# EAGLE board SAMD21_Pro_RF-Panel (EAGLE 9.6.2), part 1 of 4
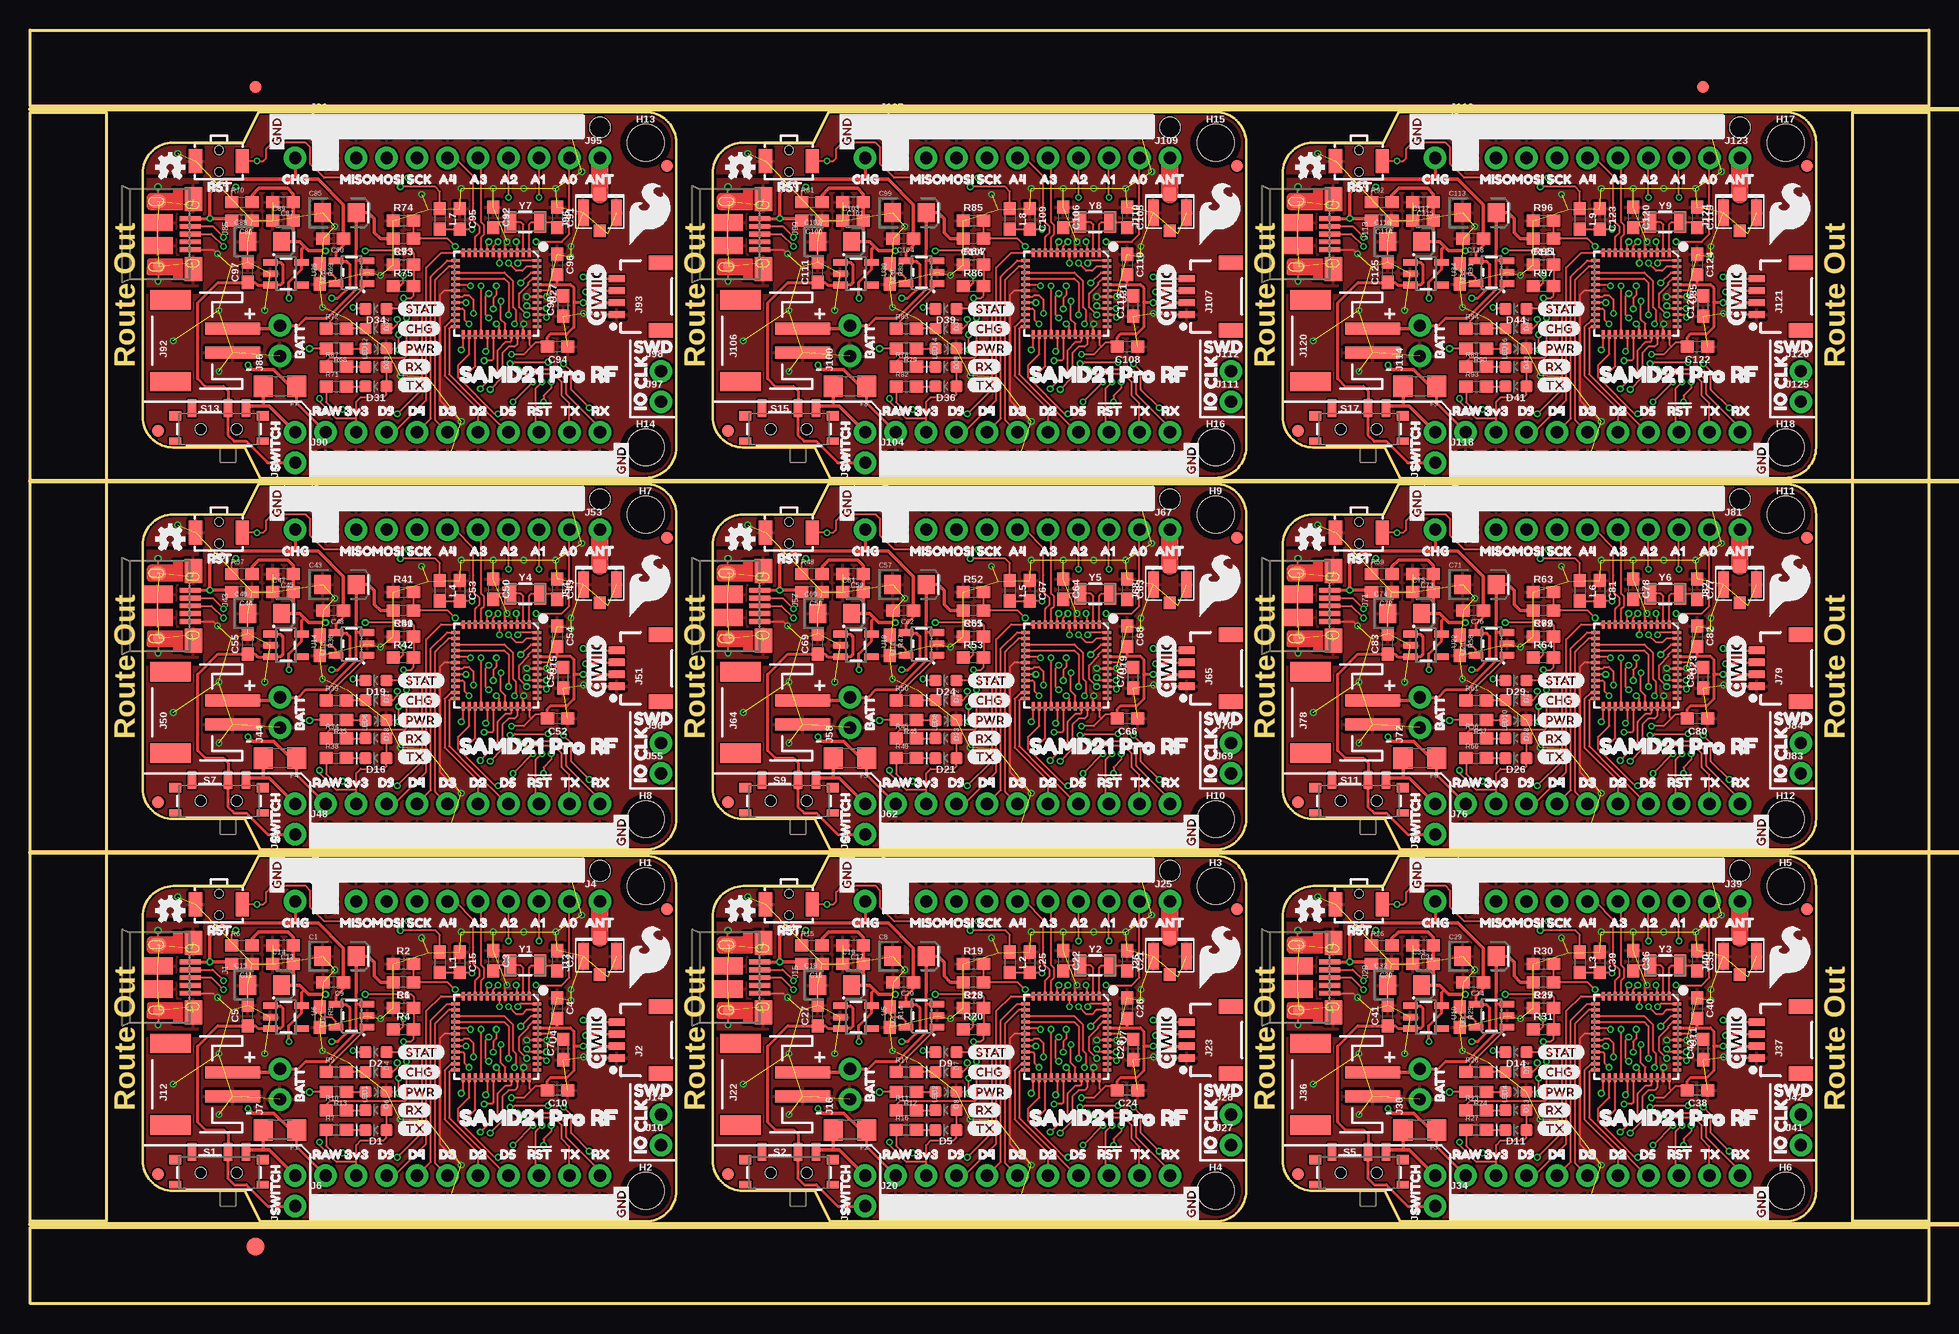
[diagram p0: board, top side]
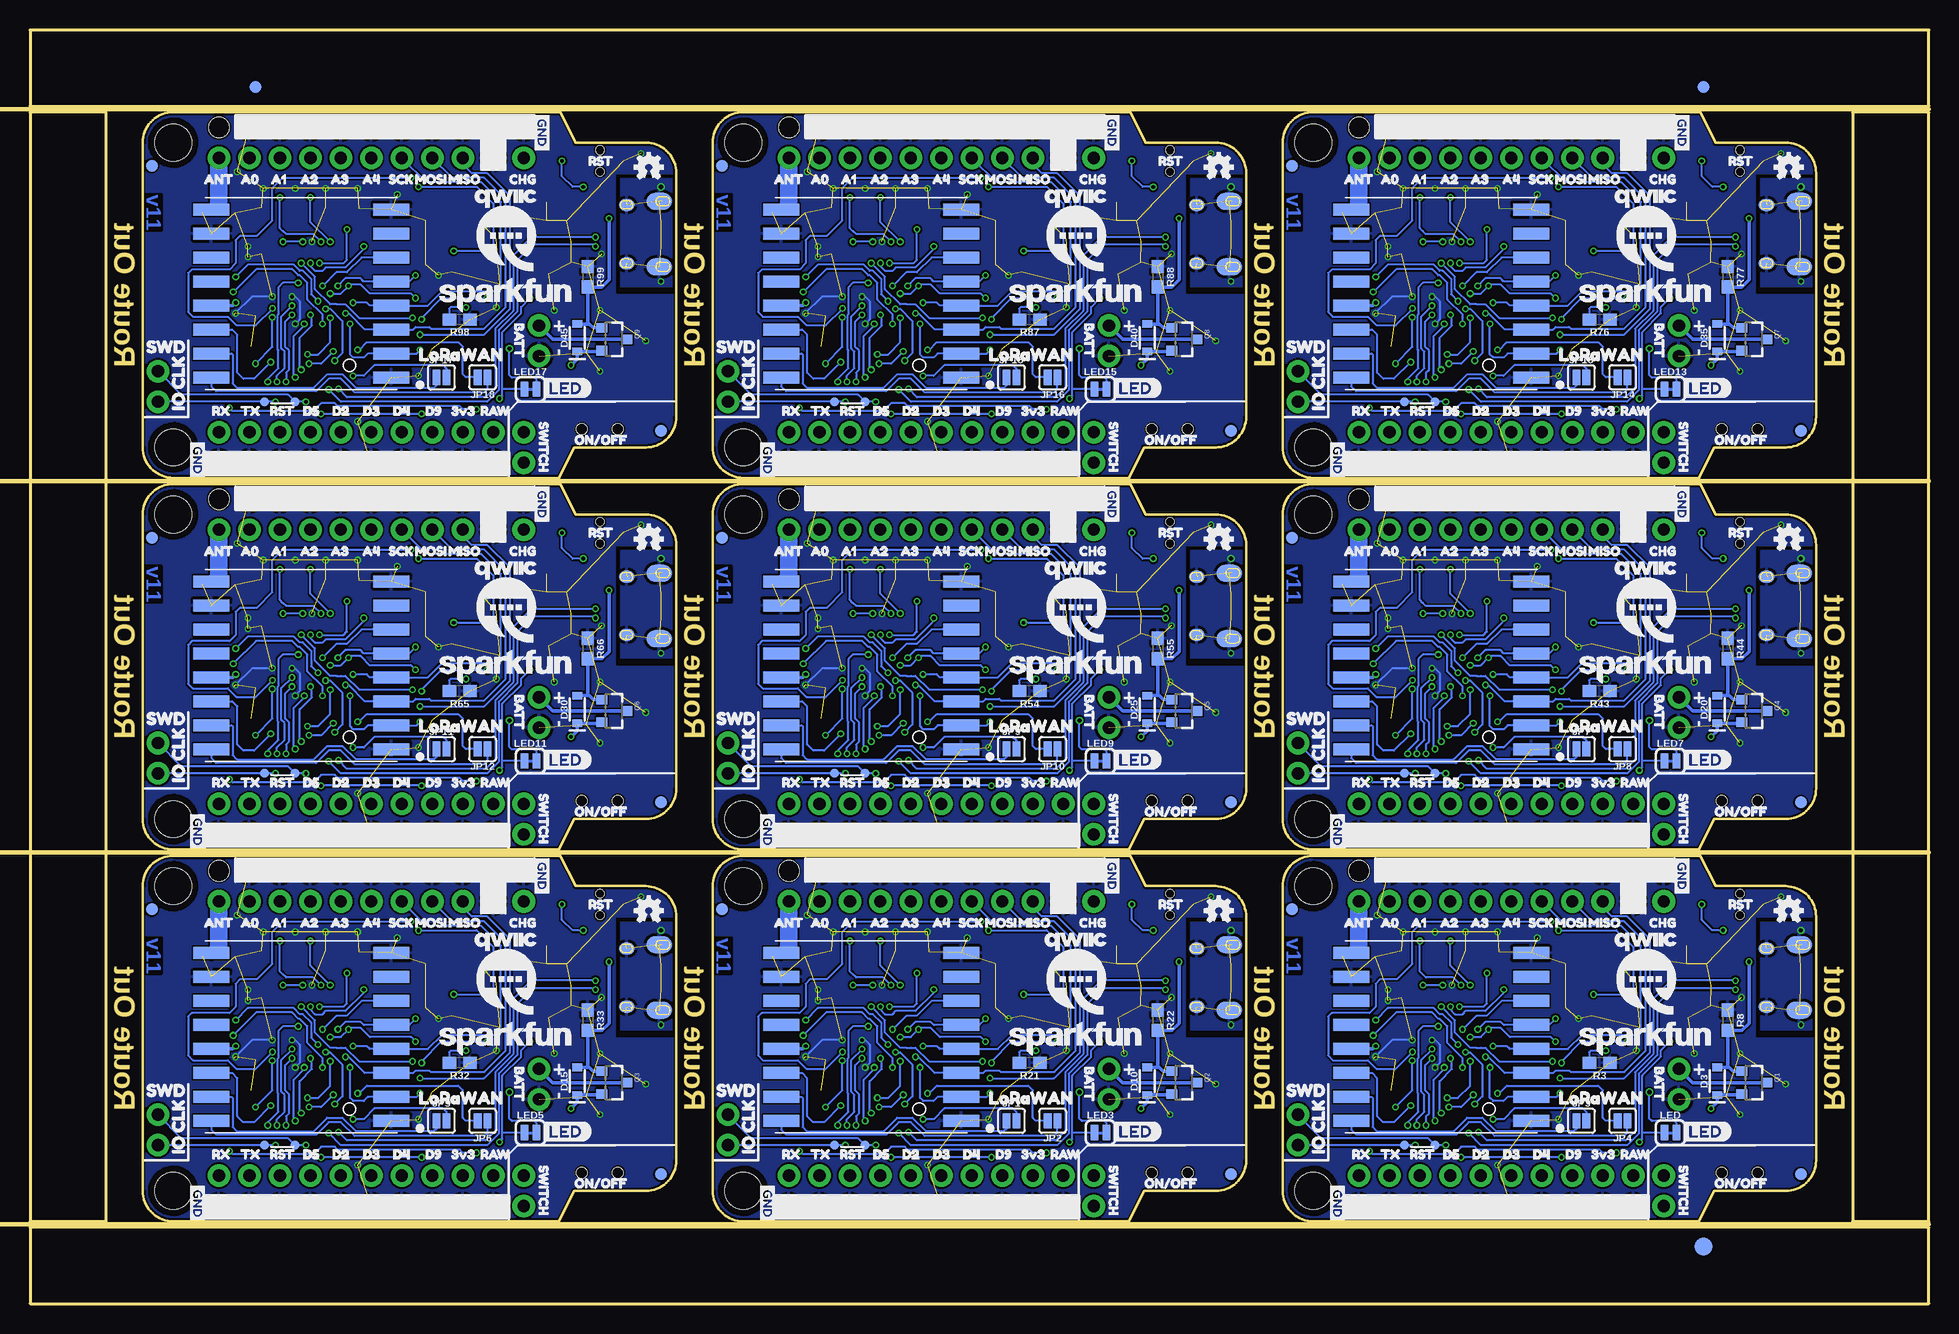
[diagram p1: board, bottom side, seen from below]

Size 158.24 x 106.17 mm. Coordinates in mm from the lower left corner, seen from the top.
Outline: 17.91,9.4 19.18,6.86 51.31,6.86 arc90 53.85,9.4 53.85,34.8 arc90 51.31,37.34 19.05,37.34 17.78,34.8 11.94,34.8 arc90 9.4,32.26 9.4,11.94 arc90 11.94,9.4 17.91,9.4
Outline: 65.41,9.4 66.67,6.86 98.81,6.86 arc90 101.35,9.4 101.35,34.8 arc90 98.81,37.34 66.55,37.34 65.28,34.8 59.44,34.8 arc90 56.9,32.26 56.9,11.94 arc90 59.44,9.4 65.41,9.4
Outline: 112.9,9.4 114.17,6.86 146.3,6.86 arc90 148.84,9.4 148.84,34.8 arc90 146.3,37.34 114.05,37.34 112.78,34.8 106.93,34.8 arc90 104.39,32.26 104.39,11.94 arc90 106.93,9.4 112.9,9.4
Outline: 17.91,40.39 19.18,37.85 51.31,37.85 arc90 53.85,40.39 53.85,65.79 arc90 51.31,68.33 19.05,68.33 17.78,65.79 11.94,65.79 arc90 9.4,63.25 9.4,42.93 arc90 11.94,40.39 17.91,40.39
Outline: 65.41,40.39 66.67,37.85 98.81,37.85 arc90 101.35,40.39 101.35,65.79 arc90 98.81,68.33 66.55,68.33 65.28,65.79 59.44,65.79 arc90 56.9,63.25 56.9,42.93 arc90 59.44,40.39 65.41,40.39
Outline: 112.9,40.39 114.17,37.85 146.3,37.85 arc90 148.84,40.39 148.84,65.79 arc90 146.3,68.33 114.05,68.33 112.78,65.79 106.93,65.79 arc90 104.39,63.25 104.39,42.93 arc90 106.93,40.39 112.9,40.39
Outline: 17.91,71.37 19.18,68.83 51.31,68.83 arc90 53.85,71.37 53.85,96.77 arc90 51.31,99.31 19.05,99.31 17.78,96.77 11.94,96.77 arc90 9.4,94.23 9.4,73.91 arc90 11.94,71.37 17.91,71.37
Outline: 65.41,71.37 66.67,68.83 98.81,68.83 arc90 101.35,71.37 101.35,96.77 arc90 98.81,99.31 66.55,99.31 65.28,96.77 59.44,96.77 arc90 56.9,94.23 56.9,73.91 arc90 59.44,71.37 65.41,71.37
Outline: 112.9,71.37 114.17,68.83 146.3,68.83 arc90 148.84,71.37 148.84,96.77 arc90 146.3,99.31 114.05,99.31 112.78,96.77 106.93,96.77 arc90 104.39,94.23 104.39,73.91 arc90 106.93,71.37 112.9,71.37
Outline: 0,6.35 158.24,6.35 158.24,0 0,0 0,6.35
Outline: 151.89,99.31 158.24,99.31 158.24,6.86 151.89,6.86 151.89,99.31
Outline: 0,106.17 158.24,106.17 158.24,99.82 0,99.82 0,106.17
Outline: 0,99.31 6.35,99.31 6.35,6.86 0,6.86 0,99.31
Copper layers (1*16): Top 0.035mm / dielectric 1.5mm / Bottom 0.035mm
Design rules "SAMD21_Pro_RF": minimum track width 4mil, minimum drill 6mil, track to track 4mil, track to pad 4mil, pad to pad 4mil, via to via 4mil, smd to smd 4mil, copper to edge 4mil, drill to drill 4mil, minimum pad ring 5mil, minimum via ring 5mil, stop-mask expansion 4mil, vias tented up to drill 25mil, thermal gap 10mil
Net classes: 0 default: width 0 mm, drill 0 mm; 1 vcc: width 0 mm
Holes 1.7 mm at 47.5,36.07 95,36.07 142.49,36.07 47.5,67.06 95,67.06 142.49,67.06 47.5,98.04 95,98.04 142.49,98.04
Milling: 4 lines

## Footprints (pad centres in the part's own frame; a part is rotated, then mirrored left to right if it is on the bottom)
EIA3216 = smd 1.4 x 1.6: + 1.4,0; - -1.4,0
0603 = smd 1.1 x 1: 1 -0.85,0; 2 0.85,0
LED-0603 = smd 1 x 1: A -0.877,0; C 0.877,0
SOD-323 = smd 0.63 x 0.83: A 1.15,0; C -1.15,0
FIDUCIAL-1X2 = smd 1 x 1: 1 0,0
FIDUCIAL-1.5X3 = smd 1.5 x 1.5: 1 0,0
1206 = smd 1.6 x 1.8: 1 -1.4,0; 2 1.4,0
STAND-OFF-TIGHT = hole 3.048: 0,0
USB-MICROB-PTH-MILL = smd 0.4 x 1.75: D+ 0,0; D- -0.65,0; GND 1.3,0; ID 0.65,0; VBUS -1.3,0 | smd 2 x 1.46: SHIELD -2.9,0.275; SHIELD2 2.9,0.275 | smd 1.425 x 2.5: SHIELD3 -0.963,-2.675; SHIELD4 0.963,-2.675 | smd 1.4 x 2.1 bottom: SHIELD5 -2.731,-2.531; SHIELD7 2.729,-2.531 | smd 1 x 1: SHIELD6 2.7,-2.575 | smd 1.1 x 1.5: SHIELD8 -2.731,-2.731 | smd 1 x 1.3 bottom: SHIELD9 -2.43,0.195; SHIELD10 2.43,0.195
1X04_1MM_RA = smd 0.6 x 1.35: 1 -1.5,0; 2 -0.5,0; 3 0.5,0; 4 1.5,0 | smd 1.2 x 2: NC1 2.8,-3.675; NC2 -2.8,-3.675
1X10_NO_SILK = drill 1.016 pad 1.88: 1 0,0; 2 2.54,0; 3 5.08,0; 4 7.62,0; 5 10.16,0; 6 12.7,0; 7 15.24,0; 8 17.78,0; 9 20.32,0; 10 22.86,0
1X01_NO_SILK = drill 1.016 pad 1.88: 1 0,0
1X09_NO_SILK = drill 1.016 pad 1.88: 1 0,0; 2 2.54,0; 3 5.08,0; 4 7.62,0; 5 10.16,0; 6 12.7,0; 7 15.24,0; 8 17.78,0; 9 20.32,0
1X02_NO_SILK = drill 1.016 pad 1.88: 1 0,0; 2 2.54,0
JST-2-SMD = smd 1 x 4.6: 1 -1,-3.7; 2 1,-3.7 | smd 1.6 x 3.4: NC1 -3.4,1.5; NC2 3.4,1.5
U.FL = smd 2.2 x 0.85: 1 0,1.375; 2 0,-1.375 | smd 1.05 x 1: FEED 1.525,0; NC -1.525,0
SMT-JUMPER_2_NO_SILK = smd 0.635 x 1.27: 1 -0.406,0; 2 0.406,0
SMT-JUMPER_2_NC_TRACE_SILK = smd 0.635 x 1.27: 1 -0.508,0; 2 0.508,0
SOT23-3@1 = smd 0.8 x 0.9: 1 -0.95,-1; 2 0.95,-1; 3 0,1.1
SWITCH_SPST_SMD_A = smd 0.7 x 1.5: 1 -2.25,-1.75; 2 -0.75,-1.75; 3 2.25,-1.75 | smd 1 x 0.6: GND1 -3.65,1; GND3 3.65,1 | smd 1 x 0.8: GND2 -3.65,-1.1; GND4 3.65,-1.1 | hole 0.9: -1.5,0; 1.5,0
TACTILE_SWITCH_SMD_RIGHT_ANGLE = smd 1.1 x 2: 1 -1.95,0; 2 1.95,0 | hole 0.7: 0,0.9; 0,-0.9
PAD.03X.03 = smd 0.762 x 0.762: P$1 0,0
SOT23-5 = smd 0.55 x 1.2: 1 -0.95,-1.3; 2 0,-1.3; 3 0.95,-1.3; 4 0.95,1.3; 5 -0.95,1.3
RFM95/96/97/98W = smd 3 x 1: 3.3V 7.5,1; !RESET -7.5,-3; ANT 7.5,-7; DIO0 7.5,3; DIO1 7.5,5; DIO2 7.5,7; DIO3 7.5,-3; DIO4 7.5,-1; DIO5 -7.5,-5; GND@1 -7.5,7; GND@2 -7.5,-7; GND@3 7.5,-5; MISO -7.5,5; MOSI -7.5,3; NSS -7.5,-1; SCK -7.5,1
QFN-48_NO_EXPOSED_PAD = smd 0.7 x 0.25: 1 -3.4,2.75; 2 -3.4,2.25; 3 -3.4,1.75; 4 -3.4,1.25; 5 -3.4,0.75; 6 -3.4,0.25; 7 -3.4,-0.25; 8 -3.4,-0.75; 9 -3.4,-1.25; 10 -3.4,-1.75; 11 -3.4,-2.25; 12 -3.4,-2.75; 25 3.4,-2.75; 26 3.4,-2.25; 27 3.4,-1.75; 28 3.4,-1.25; 29 3.4,-0.75; 30 3.4,-0.25; 31 3.4,0.25; 32 3.4,0.75; 33 3.4,1.25; 34 3.4,1.75; 35 3.4,2.25; 36 3.4,2.75 | smd 0.25 x 0.7: 13 -2.75,-3.4; 14 -2.25,-3.4; 15 -1.75,-3.4; 16 -1.25,-3.4; 17 -0.75,-3.4; 18 -0.25,-3.4; 19 0.25,-3.4; 20 0.75,-3.4; 21 1.25,-3.4; 22 1.75,-3.4; 23 2.25,-3.4; 24 2.75,-3.4; 37 2.75,3.4; 38 2.25,3.4; 39 1.75,3.4; 40 1.25,3.4; 41 0.75,3.4; 42 0.25,3.4; 43 -0.25,3.4; 44 -0.75,3.4; 45 -1.25,3.4; 46 -1.75,3.4; 47 -2.25,3.4; 48 -2.75,3.4
CRYSTAL-SMD-3.2X1.5MM = smd 1 x 1.8: P$1 -1.25,0; P$2 1.25,0

## Placement (x,y rotation side)
C1  10uF  [EIA3216]  25.78,28.96 0 top
C2  15pF  [0603]  43.94,28.57 270 top
C3  15pF  [0603]  38.61,28.57 270 top
C4  0.1uF  [0603]  43.94,24.64 270 top
C5  1.0uF  [0603]  18.16,24 90 top
C6  0.1uF  [0603]  31.11,24.64 0 top
C7  1.0uF  [0603]  44.45,21.18 90 top
C8  10uF  [EIA3216]  73.28,28.96 0 top
C9  4.7uF  [0603]  25.27,26.8 180 top
C10  0.1uF  [0603]  43.97,17.78 180 top
C11  0.1uF  [0603]  17.65,28.32 180 top
C12  1.0uF  [0603]  21.08,29.84 180 top
C13  10uF  [EIA3216]  19.56,26.54 0 top
C14  0.1uF  [0603]  21.08,28.32 0 top
C15  0.1uF  [0603]  35.81,28.45 270 top
C16  0.1uF  [0603]  65.15,28.32 180 top
C17  1.0uF  [0603]  68.58,29.84 180 top
C18  10uF  [EIA3216]  67.06,26.54 0 top
C19  0.1uF  [0603]  68.58,28.32 0 top
C20  4.7uF  [0603]  72.77,26.8 180 top
C21  15pF  [0603]  91.44,28.57 270 top
C22  15pF  [0603]  86.11,28.57 270 top
C23  0.1uF  [0603]  78.61,24.64 0 top
C24  0.1uF  [0603]  91.47,17.78 180 top
C25  0.1uF  [0603]  83.31,28.45 270 top
C26  0.1uF  [0603]  91.44,24.64 270 top
C27  1.0uF  [0603]  65.66,24 90 top
C28  1.0uF  [0603]  91.95,21.18 90 top
C29  10uF  [EIA3216]  120.78,28.96 0 top
C30  0.1uF  [0603]  112.65,28.32 180 top
C31  1.0uF  [0603]  116.08,29.84 180 top
C32  10uF  [EIA3216]  114.55,26.54 0 top
C33  0.1uF  [0603]  116.08,28.32 0 top
C34  4.7uF  [0603]  120.27,26.8 180 top
C35  15pF  [0603]  138.94,28.57 270 top
C36  15pF  [0603]  133.6,28.57 270 top
C37  0.1uF  [0603]  126.11,24.64 0 top
C38  0.1uF  [0603]  138.96,17.78 180 top
C39  0.1uF  [0603]  130.81,28.45 270 top
C40  0.1uF  [0603]  138.94,24.64 270 top
C41  1.0uF  [0603]  113.16,24 90 top
C42  1.0uF  [0603]  139.45,21.18 90 top
C43  10uF  [EIA3216]  25.78,59.94 0 top
C44  0.1uF  [0603]  17.65,59.31 180 top
C45  1.0uF  [0603]  21.08,60.83 180 top
C46  10uF  [EIA3216]  19.56,57.53 0 top
C47  0.1uF  [0603]  21.08,59.31 0 top
C48  4.7uF  [0603]  25.27,57.78 180 top
C49  15pF  [0603]  43.94,59.56 270 top
C50  15pF  [0603]  38.61,59.56 270 top
C51  0.1uF  [0603]  31.11,55.63 0 top
C52  0.1uF  [0603]  43.97,48.77 180 top
C53  0.1uF  [0603]  35.81,59.44 270 top
C54  0.1uF  [0603]  43.94,55.63 270 top
C55  1.0uF  [0603]  18.16,54.99 90 top
C56  1.0uF  [0603]  44.45,52.17 90 top
C57  10uF  [EIA3216]  73.28,59.94 0 top
C58  0.1uF  [0603]  65.15,59.31 180 top
C59  1.0uF  [0603]  68.58,60.83 180 top
C60  10uF  [EIA3216]  67.06,57.53 0 top
C61  0.1uF  [0603]  68.58,59.31 0 top
C62  4.7uF  [0603]  72.77,57.78 180 top
C63  15pF  [0603]  91.44,59.56 270 top
C64  15pF  [0603]  86.11,59.56 270 top
C65  0.1uF  [0603]  78.61,55.63 0 top
C66  0.1uF  [0603]  91.47,48.77 180 top
C67  0.1uF  [0603]  83.31,59.44 270 top
C68  0.1uF  [0603]  91.44,55.63 270 top
C69  1.0uF  [0603]  65.66,54.99 90 top
C70  1.0uF  [0603]  91.95,52.17 90 top
C71  10uF  [EIA3216]  120.78,59.94 0 top
C72  0.1uF  [0603]  112.65,59.31 180 top
C73  1.0uF  [0603]  116.08,60.83 180 top
C74  10uF  [EIA3216]  114.55,57.53 0 top
C75  0.1uF  [0603]  116.08,59.31 0 top
C76  4.7uF  [0603]  120.27,57.78 180 top
C77  15pF  [0603]  138.94,59.56 270 top
C78  15pF  [0603]  133.6,59.56 270 top
C79  0.1uF  [0603]  126.11,55.63 0 top
C80  0.1uF  [0603]  138.96,48.77 180 top
C81  0.1uF  [0603]  130.81,59.44 270 top
C82  0.1uF  [0603]  138.94,55.63 270 top
C83  1.0uF  [0603]  113.16,54.99 90 top
C84  1.0uF  [0603]  139.45,52.17 90 top
C85  10uF  [EIA3216]  25.78,90.93 0 top
C86  0.1uF  [0603]  17.65,90.3 180 top
C87  1.0uF  [0603]  21.08,91.82 180 top
C88  10uF  [EIA3216]  19.56,88.52 0 top
C89  0.1uF  [0603]  21.08,90.3 0 top
C90  4.7uF  [0603]  25.27,88.77 180 top
C91  15pF  [0603]  43.94,90.55 270 top
C92  15pF  [0603]  38.61,90.55 270 top
C93  0.1uF  [0603]  31.11,86.61 0 top
C94  0.1uF  [0603]  43.97,79.76 180 top
C95  0.1uF  [0603]  35.81,90.42 270 top
C96  0.1uF  [0603]  43.94,86.61 270 top
C97  1.0uF  [0603]  18.16,85.98 90 top
C98  1.0uF  [0603]  44.45,83.16 90 top
C99  10uF  [EIA3216]  73.28,90.93 0 top
C100  0.1uF  [0603]  65.15,90.3 180 top
C101  1.0uF  [0603]  68.58,91.82 180 top
C102  10uF  [EIA3216]  67.06,88.52 0 top
C103  0.1uF  [0603]  68.58,90.3 0 top
C104  4.7uF  [0603]  72.77,88.77 180 top
C105  15pF  [0603]  91.44,90.55 270 top
C106  15pF  [0603]  86.11,90.55 270 top
C107  0.1uF  [0603]  78.61,86.61 0 top
C108  0.1uF  [0603]  91.47,79.76 180 top
C109  0.1uF  [0603]  83.31,90.42 270 top
C110  0.1uF  [0603]  91.44,86.61 270 top
C111  1.0uF  [0603]  65.66,85.98 90 top
C112  1.0uF  [0603]  91.95,83.16 90 top
C113  10uF  [EIA3216]  120.78,90.93 0 top
C114  0.1uF  [0603]  112.65,90.3 180 top
C115  1.0uF  [0603]  116.08,91.82 180 top
C116  10uF  [EIA3216]  114.55,88.52 0 top
C117  0.1uF  [0603]  116.08,90.3 0 top
C118  4.7uF  [0603]  120.27,88.77 180 top
C119  15pF  [0603]  138.94,90.55 270 top
C120  15pF  [0603]  133.6,90.55 270 top
C121  0.1uF  [0603]  126.11,86.61 0 top
C122  0.1uF  [0603]  138.96,79.76 180 top
C123  0.1uF  [0603]  130.81,90.42 270 top
C124  0.1uF  [0603]  138.94,86.61 270 top
C125  1.0uF  [0603]  113.16,85.98 90 top
C126  1.0uF  [0603]  139.45,83.16 90 top
D1  Green  [LED-0603]  28.83,14.48 180 top
D2  BLUE  [LED-0603]  28.83,20.95 180 top
D3  1A/23V/620mV  [SOD-323]  17.65,18.54 90 bottom
D4  BLUE  [LED-0603]  28.83,19.3 180 top
D5  Green  [LED-0603]  76.33,14.48 180 top
D6  Yellow  [LED-0603]  28.83,16.13 180 top
D7  BLUE  [LED-0603]  76.33,19.3 180 top
D8  Yellow  [LED-0603]  76.33,16.13 180 top
D9  BLUE  [LED-0603]  76.33,20.95 180 top
D10  1A/23V/620mV  [SOD-323]  65.15,18.54 90 bottom
D11  Green  [LED-0603]  123.83,14.48 180 top
D12  BLUE  [LED-0603]  123.83,19.3 180 top
D13  Yellow  [LED-0603]  123.83,16.13 180 top
D14  BLUE  [LED-0603]  123.83,20.95 180 top
D15  1A/23V/620mV  [SOD-323]  112.65,18.54 90 bottom
D16  Green  [LED-0603]  28.83,45.47 180 top
D17  BLUE  [LED-0603]  28.83,50.29 180 top
D18  Yellow  [LED-0603]  28.83,47.12 180 top
D19  BLUE  [LED-0603]  28.83,51.94 180 top
D20  1A/23V/620mV  [SOD-323]  17.65,49.53 90 bottom
D21  Green  [LED-0603]  76.33,45.47 180 top
D22  BLUE  [LED-0603]  76.33,50.29 180 top
D23  Yellow  [LED-0603]  76.33,47.12 180 top
D24  BLUE  [LED-0603]  76.33,51.94 180 top
D25  1A/23V/620mV  [SOD-323]  65.15,49.53 90 bottom
D26  Green  [LED-0603]  123.83,45.47 180 top
D27  BLUE  [LED-0603]  123.83,50.29 180 top
D28  Yellow  [LED-0603]  123.83,47.12 180 top
D29  BLUE  [LED-0603]  123.83,51.94 180 top
D30  1A/23V/620mV  [SOD-323]  112.65,49.53 90 bottom
D31  Green  [LED-0603]  28.83,76.45 180 top
D32  BLUE  [LED-0603]  28.83,81.28 180 top
D33  Yellow  [LED-0603]  28.83,78.11 180 top
D34  BLUE  [LED-0603]  28.83,82.93 180 top
D35  1A/23V/620mV  [SOD-323]  17.65,80.52 90 bottom
D36  Green  [LED-0603]  76.33,76.45 180 top
D37  BLUE  [LED-0603]  76.33,81.28 180 top
D38  Yellow  [LED-0603]  76.33,78.11 180 top
D39  BLUE  [LED-0603]  76.33,82.93 180 top
D40  1A/23V/620mV  [SOD-323]  65.15,80.52 90 bottom
D41  Green  [LED-0603]  123.83,76.45 180 top
D42  BLUE  [LED-0603]  123.83,81.28 180 top
D43  Yellow  [LED-0603]  123.83,78.11 180 top
D44  BLUE  [LED-0603]  123.83,82.93 180 top
D45  1A/23V/620mV  [SOD-323]  112.65,80.52 90 bottom
E$1  [FIDUCIAL-1X2]  18.8,101.41 0 top
E$2  [FIDUCIAL-1X2]  18.8,101.41 0 bottom
E$3  [FIDUCIAL-1X2]  139.43,101.41 0 top
E$4  [FIDUCIAL-1X2]  139.43,101.41 0 bottom
E$5  [FIDUCIAL-1.5X3]  18.8,4.76 0 top
E$6  [FIDUCIAL-1.5X3]  18.8,4.76 0 bottom
F1  6V/0.5A  [1206]  20.83,14.48 180 top
F2  6V/0.5A  [1206]  68.33,14.48 180 top
F3  6V/0.5A  [1206]  115.82,14.48 180 top
F4  6V/0.5A  [1206]  20.83,45.47 180 top
F5  6V/0.5A  [1206]  68.33,45.47 180 top
F6  6V/0.5A  [1206]  115.82,45.47 180 top
F7  6V/0.5A  [1206]  20.83,76.45 180 top
F8  6V/0.5A  [1206]  68.33,76.45 180 top
F9  6V/0.5A  [1206]  115.82,76.45 180 top
FD1  FIDUCIAL1X2  [FIDUCIAL-1X2]  10.67,10.79 0 bottom
FD2  FIDUCIAL1X2  [FIDUCIAL-1X2]  53.09,32.87 0 bottom
FD3  FIDUCIAL1X2  [FIDUCIAL-1X2]  10.67,10.79 0 top
FD4  FIDUCIAL1X2  [FIDUCIAL-1X2]  53.09,32.87 0 top
FD5  FIDUCIAL1X2  [FIDUCIAL-1X2]  58.17,10.79 0 bottom
FD6  FIDUCIAL1X2  [FIDUCIAL-1X2]  100.58,32.87 0 bottom
FD7  FIDUCIAL1X2  [FIDUCIAL-1X2]  58.17,10.79 0 top
FD8  FIDUCIAL1X2  [FIDUCIAL-1X2]  100.58,32.87 0 top
FD9  FIDUCIAL1X2  [FIDUCIAL-1X2]  105.66,10.79 0 bottom
FD10  FIDUCIAL1X2  [FIDUCIAL-1X2]  148.08,32.87 0 bottom
FD11  FIDUCIAL1X2  [FIDUCIAL-1X2]  105.66,10.79 0 top
FD12  FIDUCIAL1X2  [FIDUCIAL-1X2]  148.08,32.87 0 top
FD13  FIDUCIAL1X2  [FIDUCIAL-1X2]  10.67,41.78 0 bottom
FD14  FIDUCIAL1X2  [FIDUCIAL-1X2]  53.09,63.86 0 bottom
FD15  FIDUCIAL1X2  [FIDUCIAL-1X2]  10.67,41.78 0 top
FD16  FIDUCIAL1X2  [FIDUCIAL-1X2]  53.09,63.86 0 top
FD17  FIDUCIAL1X2  [FIDUCIAL-1X2]  58.17,41.78 0 bottom
FD18  FIDUCIAL1X2  [FIDUCIAL-1X2]  100.58,63.86 0 bottom
FD19  FIDUCIAL1X2  [FIDUCIAL-1X2]  58.17,41.78 0 top
FD20  FIDUCIAL1X2  [FIDUCIAL-1X2]  100.58,63.86 0 top
FD21  FIDUCIAL1X2  [FIDUCIAL-1X2]  105.66,41.78 0 bottom
FD22  FIDUCIAL1X2  [FIDUCIAL-1X2]  148.08,63.86 0 bottom
FD23  FIDUCIAL1X2  [FIDUCIAL-1X2]  105.66,41.78 0 top
FD24  FIDUCIAL1X2  [FIDUCIAL-1X2]  148.08,63.86 0 top
FD25  FIDUCIAL1X2  [FIDUCIAL-1X2]  10.67,72.77 0 bottom
FD26  FIDUCIAL1X2  [FIDUCIAL-1X2]  53.09,94.84 0 bottom
FD27  FIDUCIAL1X2  [FIDUCIAL-1X2]  10.67,72.77 0 top
FD28  FIDUCIAL1X2  [FIDUCIAL-1X2]  53.09,94.84 0 top
FD29  FIDUCIAL1X2  [FIDUCIAL-1X2]  58.17,72.77 0 bottom
FD30  FIDUCIAL1X2  [FIDUCIAL-1X2]  100.58,94.84 0 bottom
FD31  FIDUCIAL1X2  [FIDUCIAL-1X2]  58.17,72.77 0 top
FD32  FIDUCIAL1X2  [FIDUCIAL-1X2]  100.58,94.84 0 top
FD33  FIDUCIAL1X2  [FIDUCIAL-1X2]  105.66,72.77 0 bottom
FD34  FIDUCIAL1X2  [FIDUCIAL-1X2]  148.08,94.84 0 bottom
FD35  FIDUCIAL1X2  [FIDUCIAL-1X2]  105.66,72.77 0 top
FD36  FIDUCIAL1X2  [FIDUCIAL-1X2]  148.08,94.84 0 top
H1  STAND-OFFTIGHT  [STAND-OFF-TIGHT]  51.31,34.8 0 top
H2  STAND-OFFTIGHT  [STAND-OFF-TIGHT]  51.31,9.4 0 top
H3  STAND-OFFTIGHT  [STAND-OFF-TIGHT]  98.81,34.8 0 top
H4  STAND-OFFTIGHT  [STAND-OFF-TIGHT]  98.81,9.4 0 top
H5  STAND-OFFTIGHT  [STAND-OFF-TIGHT]  146.3,34.8 0 top
H6  STAND-OFFTIGHT  [STAND-OFF-TIGHT]  146.3,9.4 0 top
H7  STAND-OFFTIGHT  [STAND-OFF-TIGHT]  51.31,65.79 0 top
H8  STAND-OFFTIGHT  [STAND-OFF-TIGHT]  51.31,40.39 0 top
H9  STAND-OFFTIGHT  [STAND-OFF-TIGHT]  98.81,65.79 0 top
H10  STAND-OFFTIGHT  [STAND-OFF-TIGHT]  98.81,40.39 0 top
H11  STAND-OFFTIGHT  [STAND-OFF-TIGHT]  146.3,65.79 0 top
H12  STAND-OFFTIGHT  [STAND-OFF-TIGHT]  146.3,40.39 0 top
H13  STAND-OFFTIGHT  [STAND-OFF-TIGHT]  51.31,96.77 0 top
H14  STAND-OFFTIGHT  [STAND-OFF-TIGHT]  51.31,71.37 0 top
H15  STAND-OFFTIGHT  [STAND-OFF-TIGHT]  98.81,96.77 0 top
H16  STAND-OFFTIGHT  [STAND-OFF-TIGHT]  98.81,71.37 0 top
H17  STAND-OFFTIGHT  [STAND-OFF-TIGHT]  146.3,96.77 0 top
H18  STAND-OFFTIGHT  [STAND-OFF-TIGHT]  146.3,71.37 0 top
J1  [USB-MICROB-PTH-MILL]  13.33,27.18 270 top
J2  [1X04_1MM_RA]  48.89,21.97 90 top
J3  [1X10_NO_SILK]  24.64,10.67 0 top
J4  [1X01_NO_SILK]  47.5,33.53 0 top
J5  [1X09_NO_SILK]  24.64,36.07 0 top
J6  [1X10_NO_SILK]  24.64,8.13 0 top
J7  PTH  [1X02_NO_SILK]  20.83,17.02 90 top
J8  [1X02_NO_SILK]  22.1,36.07 270 top
J9  External On/Off  [1X02_NO_SILK]  22.1,8.13 90 top
J10  [1X01_NO_SILK]  52.58,13.21 0 top
J11  [1X09_NO_SILK]  24.64,33.53 0 top
J12  JST  [JST-2-SMD]  13.21,18.29 90 top
J13  U.FL  [U.FL]  47.5,28.96 90 top
J14  [1X01_NO_SILK]  52.58,15.75 0 top
J15  [USB-MICROB-PTH-MILL]  60.83,27.18 270 top
J16  PTH  [1X02_NO_SILK]  68.33,17.02 90 top
J17  [1X02_NO_SILK]  69.6,36.07 270 top
J18  External On/Off  [1X02_NO_SILK]  69.6,8.13 90 top
J19  [1X10_NO_SILK]  72.14,10.67 0 top
J20  [1X10_NO_SILK]  72.14,8.13 0 top
J21  [1X09_NO_SILK]  72.14,36.07 0 top
J22  JST  [JST-2-SMD]  60.71,18.29 90 top
J23  [1X04_1MM_RA]  96.39,21.97 90 top
J24  [1X09_NO_SILK]  72.14,33.53 0 top
J25  [1X01_NO_SILK]  95,33.53 0 top
J26  U.FL  [U.FL]  95,28.96 90 top
J27  [1X01_NO_SILK]  100.08,13.21 0 top
J28  [1X01_NO_SILK]  100.08,15.75 0 top
J29  [USB-MICROB-PTH-MILL]  108.33,27.18 270 top
J30  PTH  [1X02_NO_SILK]  115.82,17.02 90 top
J31  [1X02_NO_SILK]  117.09,36.07 270 top
J32  External On/Off  [1X02_NO_SILK]  117.09,8.13 90 top
J33  [1X10_NO_SILK]  119.63,10.67 0 top
J34  [1X10_NO_SILK]  119.63,8.13 0 top
J35  [1X09_NO_SILK]  119.63,36.07 0 top
J36  JST  [JST-2-SMD]  108.2,18.29 90 top
J37  [1X04_1MM_RA]  143.89,21.97 90 top
J38  [1X09_NO_SILK]  119.63,33.53 0 top
J39  [1X01_NO_SILK]  142.49,33.53 0 top
J40  U.FL  [U.FL]  142.49,28.96 90 top
J41  [1X01_NO_SILK]  147.57,13.21 0 top
J42  [1X01_NO_SILK]  147.57,15.75 0 top
J43  [USB-MICROB-PTH-MILL]  13.33,58.17 270 top
J44  PTH  [1X02_NO_SILK]  20.83,48.01 90 top
J45  [1X02_NO_SILK]  22.1,67.06 270 top
J46  External On/Off  [1X02_NO_SILK]  22.1,39.12 90 top
J47  [1X10_NO_SILK]  24.64,41.66 0 top
J48  [1X10_NO_SILK]  24.64,39.12 0 top
J49  [1X09_NO_SILK]  24.64,67.06 0 top
J50  JST  [JST-2-SMD]  13.21,49.28 90 top
J51  [1X04_1MM_RA]  48.89,52.96 90 top
J52  [1X09_NO_SILK]  24.64,64.52 0 top
J53  [1X01_NO_SILK]  47.5,64.52 0 top
J54  U.FL  [U.FL]  47.5,59.94 90 top
J55  [1X01_NO_SILK]  52.58,44.2 0 top
J56  [1X01_NO_SILK]  52.58,46.74 0 top
J57  [USB-MICROB-PTH-MILL]  60.83,58.17 270 top
J58  PTH  [1X02_NO_SILK]  68.33,48.01 90 top
J59  [1X02_NO_SILK]  69.6,67.06 270 top
J60  External On/Off  [1X02_NO_SILK]  69.6,39.12 90 top
J61  [1X10_NO_SILK]  72.14,41.66 0 top
J62  [1X10_NO_SILK]  72.14,39.12 0 top
J63  [1X09_NO_SILK]  72.14,67.06 0 top
J64  JST  [JST-2-SMD]  60.71,49.28 90 top
J65  [1X04_1MM_RA]  96.39,52.96 90 top
J66  [1X09_NO_SILK]  72.14,64.52 0 top
J67  [1X01_NO_SILK]  95,64.52 0 top
J68  U.FL  [U.FL]  95,59.94 90 top
J69  [1X01_NO_SILK]  100.08,44.2 0 top
J70  [1X01_NO_SILK]  100.08,46.74 0 top
J71  [USB-MICROB-PTH-MILL]  108.33,58.17 270 top
J72  PTH  [1X02_NO_SILK]  115.82,48.01 90 top
J73  [1X02_NO_SILK]  117.09,67.06 270 top
J74  External On/Off  [1X02_NO_SILK]  117.09,39.12 90 top
J75  [1X10_NO_SILK]  119.63,41.66 0 top
J76  [1X10_NO_SILK]  119.63,39.12 0 top
J77  [1X09_NO_SILK]  119.63,67.06 0 top
J78  JST  [JST-2-SMD]  108.2,49.28 90 top
J79  [1X04_1MM_RA]  143.89,52.96 90 top
J80  [1X09_NO_SILK]  119.63,64.52 0 top
J81  [1X01_NO_SILK]  142.49,64.52 0 top
J82  U.FL  [U.FL]  142.49,59.94 90 top
J83  [1X01_NO_SILK]  147.57,44.2 0 top
J84  [1X01_NO_SILK]  147.57,46.74 0 top
J85  [USB-MICROB-PTH-MILL]  13.33,89.15 270 top
J86  PTH  [1X02_NO_SILK]  20.83,78.99 90 top
J87  [1X02_NO_SILK]  22.1,98.04 270 top
J88  External On/Off  [1X02_NO_SILK]  22.1,70.1 90 top
J89  [1X10_NO_SILK]  24.64,72.64 0 top
J90  [1X10_NO_SILK]  24.64,70.1 0 top
J91  [1X09_NO_SILK]  24.64,98.04 0 top
J92  JST  [JST-2-SMD]  13.21,80.26 90 top
J93  [1X04_1MM_RA]  48.89,83.95 90 top
J94  [1X09_NO_SILK]  24.64,95.5 0 top
J95  [1X01_NO_SILK]  47.5,95.5 0 top
J96  U.FL  [U.FL]  47.5,90.93 90 top
J97  [1X01_NO_SILK]  52.58,75.18 0 top
J98  [1X01_NO_SILK]  52.58,77.72 0 top
J99  [USB-MICROB-PTH-MILL]  60.83,89.15 270 top
J100  PTH  [1X02_NO_SILK]  68.33,78.99 90 top
J101  [1X02_NO_SILK]  69.6,98.04 270 top
J102  External On/Off  [1X02_NO_SILK]  69.6,70.1 90 top
J103  [1X10_NO_SILK]  72.14,72.64 0 top
J104  [1X10_NO_SILK]  72.14,70.1 0 top
J105  [1X09_NO_SILK]  72.14,98.04 0 top
J106  JST  [JST-2-SMD]  60.71,80.26 90 top
J107  [1X04_1MM_RA]  96.39,83.95 90 top
J108  [1X09_NO_SILK]  72.14,95.5 0 top
J109  [1X01_NO_SILK]  95,95.5 0 top
J110  U.FL  [U.FL]  95,90.93 90 top
J111  [1X01_NO_SILK]  100.08,75.18 0 top
J112  [1X01_NO_SILK]  100.08,77.72 0 top
J113  [USB-MICROB-PTH-MILL]  108.33,89.15 270 top
J114  PTH  [1X02_NO_SILK]  115.82,78.99 90 top
J115  [1X02_NO_SILK]  117.09,98.04 270 top
J116  External On/Off  [1X02_NO_SILK]  117.09,70.1 90 top
J117  [1X10_NO_SILK]  119.63,72.64 0 top
J118  [1X10_NO_SILK]  119.63,70.1 0 top
J119  [1X09_NO_SILK]  119.63,98.04 0 top
J120  JST  [JST-2-SMD]  108.2,80.26 90 top
J121  [1X04_1MM_RA]  143.89,83.95 90 top
J122  [1X09_NO_SILK]  119.63,95.5 0 top
J123  [1X01_NO_SILK]  142.49,95.5 0 top
J124  U.FL  [U.FL]  142.49,90.93 90 top
J125  [1X01_NO_SILK]  147.57,75.18 0 top
J126  [1X01_NO_SILK]  147.57,77.72 0 top
JP1  [SMT-JUMPER_2_NO_SILK]  76.45,15.24 0 bottom
JP2  [SMT-JUMPER_2_NO_SILK]  73.03,15.24 180 bottom
JP3  [SMT-JUMPER_2_NO_SILK]  28.96,15.24 0 bottom
JP4  [SMT-JUMPER_2_NO_SILK]  25.53,15.24 180 bottom
JP5  [SMT-JUMPER_2_NO_SILK]  123.95,15.24 0 bottom
JP6  [SMT-JUMPER_2_NO_SILK]  120.52,15.24 180 bottom
JP7  [SMT-JUMPER_2_NO_SILK]  28.96,46.23 0 bottom
JP8  [SMT-JUMPER_2_NO_SILK]  25.53,46.23 180 bottom
JP9  [SMT-JUMPER_2_NO_SILK]  76.45,46.23 0 bottom
JP10  [SMT-JUMPER_2_NO_SILK]  73.03,46.23 180 bottom
JP11  [SMT-JUMPER_2_NO_SILK]  123.95,46.23 0 bottom
JP12  [SMT-JUMPER_2_NO_SILK]  120.52,46.23 180 bottom
JP13  [SMT-JUMPER_2_NO_SILK]  28.96,77.22 0 bottom
JP14  [SMT-JUMPER_2_NO_SILK]  25.53,77.22 180 bottom
JP15  [SMT-JUMPER_2_NO_SILK]  76.45,77.22 0 bottom
JP16  [SMT-JUMPER_2_NO_SILK]  73.03,77.22 180 bottom
JP17  [SMT-JUMPER_2_NO_SILK]  123.95,77.22 0 bottom
JP18  [SMT-JUMPER_2_NO_SILK]  120.52,77.22 180 bottom
L1  [0603]  34.16,28.45 270 top
L2  [0603]  81.66,28.45 270 top
L3  [0603]  129.16,28.45 270 top
L4  [0603]  34.16,59.44 270 top
L5  [0603]  81.66,59.44 270 top
L6  [0603]  129.16,59.44 270 top
L7  [0603]  34.16,90.42 270 top
L8  [0603]  81.66,90.42 270 top
L9  [0603]  129.16,90.42 270 top
LED  [SMT-JUMPER_2_NC_TRACE_SILK]  21.54,14.25 0 bottom
LED1  RED  [LED-0603]  28.83,17.65 0 top
LED2  RED  [LED-0603]  76.33,17.65 0 top
LED3  [SMT-JUMPER_2_NC_TRACE_SILK]  69.04,14.25 0 bottom
LED4  RED  [LED-0603]  123.83,17.65 0 top
LED5  [SMT-JUMPER_2_NC_TRACE_SILK]  116.54,14.25 0 bottom
LED6  RED  [LED-0603]  28.83,48.64 0 top
LED7  [SMT-JUMPER_2_NC_TRACE_SILK]  21.54,45.24 0 bottom
LED8  RED  [LED-0603]  76.33,48.64 0 top
LED9  [SMT-JUMPER_2_NC_TRACE_SILK]  69.04,45.24 0 bottom
LED10  RED  [LED-0603]  123.83,48.64 0 top
LED11  [SMT-JUMPER_2_NC_TRACE_SILK]  116.54,45.24 0 bottom
LED12  RED  [LED-0603]  28.83,79.63 0 top
LED13  [SMT-JUMPER_2_NC_TRACE_SILK]  21.54,76.23 0 bottom
LED14  RED  [LED-0603]  76.33,79.63 0 top
LED15  [SMT-JUMPER_2_NC_TRACE_SILK]  69.04,76.23 0 bottom
LED16  RED  [LED-0603]  123.83,79.63 0 top
LED17  [SMT-JUMPER_2_NC_TRACE_SILK]  116.54,76.23 0 bottom
LOGO1  OSHW-LOGOMINI  [OSHW-LOGO-MINI]  11.68,32.77 0 bottom
LOGO2  SFE_LOGO_NAME.1_INCH  [SFE_LOGO_NAME_.1]  29.59,20.19 0 bottom
LOGO3  QWIIC_LOGO_5MM  [QWIIC_5MM]  47.19,22.1 90 top
LOGO4  OSHW-LOGOMINI  [OSHW-LOGO-MINI]  59.18,32.77 0 bottom
LOGO5  SFE_LOGO_NAME.1_INCH  [SFE_LOGO_NAME_.1]  77.09,20.19 0 bottom
LOGO6  QWIIC_LOGO_5MM  [QWIIC_5MM]  94.69,22.1 90 top
LOGO7  OSHW-LOGOMINI  [OSHW-LOGO-MINI]  106.68,32.77 0 bottom
LOGO8  SFE_LOGO_NAME.1_INCH  [SFE_LOGO_NAME_.1]  124.59,20.19 0 bottom
LOGO9  QWIIC_LOGO_5MM  [QWIIC_5MM]  142.19,22.1 90 top
LOGO10  OSHW-LOGOMINI  [OSHW-LOGO-MINI]  11.68,63.75 0 bottom
LOGO11  SFE_LOGO_NAME.1_INCH  [SFE_LOGO_NAME_.1]  29.59,51.18 0 bottom
LOGO12  QWIIC_LOGO_5MM  [QWIIC_5MM]  47.19,53.09 90 top
LOGO13  OSHW-LOGOMINI  [OSHW-LOGO-MINI]  59.18,63.75 0 bottom
LOGO14  SFE_LOGO_NAME.1_INCH  [SFE_LOGO_NAME_.1]  77.09,51.18 0 bottom
LOGO15  QWIIC_LOGO_5MM  [QWIIC_5MM]  94.69,53.09 90 top
LOGO16  OSHW-LOGOMINI  [OSHW-LOGO-MINI]  106.68,63.75 0 bottom
LOGO17  SFE_LOGO_NAME.1_INCH  [SFE_LOGO_NAME_.1]  124.59,51.18 0 bottom
LOGO18  QWIIC_LOGO_5MM  [QWIIC_5MM]  142.19,53.09 90 top
LOGO19  OSHW-LOGOMINI  [OSHW-LOGO-MINI]  11.68,94.74 0 bottom
LOGO20  SFE_LOGO_NAME.1_INCH  [SFE_LOGO_NAME_.1]  29.59,82.17 0 bottom
LOGO21  QWIIC_LOGO_5MM  [QWIIC_5MM]  47.19,84.07 90 top
LOGO22  OSHW-LOGOMINI  [OSHW-LOGO-MINI]  59.18,94.74 0 bottom
LOGO23  SFE_LOGO_NAME.1_INCH  [SFE_LOGO_NAME_.1]  77.09,82.17 0 bottom
LOGO24  QWIIC_LOGO_5MM  [QWIIC_5MM]  94.69,84.07 90 top
LOGO25  OSHW-LOGOMINI  [OSHW-LOGO-MINI]  106.68,94.74 0 bottom
LOGO26  SFE_LOGO_NAME.1_INCH  [SFE_LOGO_NAME_.1]  124.59,82.17 0 bottom
LOGO27  QWIIC_LOGO_5MM  [QWIIC_5MM]  142.19,84.07 90 top
Q1  2.5A/30V  [SOT23-3@1]  14.61,18.41 270 bottom
Q2  2.5A/30V  [SOT23-3@1]  62.1,18.41 270 bottom
Q3  2.5A/30V  [SOT23-3@1]  109.6,18.41 270 bottom
Q4  2.5A/30V  [SOT23-3@1]  14.61,49.4 270 bottom
Q5  2.5A/30V  [SOT23-3@1]  62.1,49.4 270 bottom
Q6  2.5A/30V  [SOT23-3@1]  109.6,49.4 270 bottom
Q7  2.5A/30V  [SOT23-3@1]  14.61,80.39 270 bottom
Q8  2.5A/30V  [SOT23-3@1]  62.1,80.39 270 bottom
Q9  2.5A/30V  [SOT23-3@1]  109.6,80.39 270 bottom
R1  1M  [0603]  31.11,26.8 180 top
R2  1M  [0603]  31.11,28.32 0 top
R3  1k  [0603]  27.43,20.07 180 bottom
R4  10k  [0603]  31.11,22.86 0 top
R5  2.0k  [0603]  24.13,23.88 270 top
R6  10k  [0603]  17.65,29.84 0 top
R7  1k  [0603]  25.53,14.48 0 top
R8  10k  [0603]  16.76,23.62 270 bottom
R9  1k  [0603]  25.53,19.3 0 top
R10  1k  [0603]  25.53,16.13 0 top
R11  1k  [0603]  73.03,16.13 0 top
R12  1k  [0603]  73.03,17.65 180 top
R13  1k  [0603]  25.53,17.65 180 top
R14  2.0k  [0603]  71.63,23.88 270 top
R15  10k  [0603]  65.15,29.84 0 top
R16  1k  [0603]  73.03,14.48 0 top
R17  1k  [0603]  73.03,19.3 0 top
R18  1M  [0603]  78.61,26.8 180 top
R19  1M  [0603]  78.61,28.32 0 top
R20  10k  [0603]  78.61,22.86 0 top
R21  1k  [0603]  74.93,20.07 180 bottom
R22  10k  [0603]  64.26,23.62 270 bottom
R23  1k  [0603]  120.52,16.13 0 top
R24  1k  [0603]  120.52,17.65 180 top
R25  2.0k  [0603]  119.13,23.88 270 top
R26  10k  [0603]  112.65,29.84 0 top
R27  1k  [0603]  120.52,14.48 0 top
R28  1k  [0603]  120.52,19.3 0 top
R29  1M  [0603]  126.11,26.8 180 top
R30  1M  [0603]  126.11,28.32 0 top
R31  10k  [0603]  126.11,22.86 0 top
R32  1k  [0603]  122.43,20.07 180 bottom
R33  10k  [0603]  111.76,23.62 270 bottom
R34  1k  [0603]  25.53,47.12 0 top
R35  1k  [0603]  25.53,48.64 180 top
R36  2.0k  [0603]  24.13,54.86 270 top
R37  10k  [0603]  17.65,60.83 0 top
R38  1k  [0603]  25.53,45.47 0 top
R39  1k  [0603]  25.53,50.29 0 top
R40  1M  [0603]  31.11,57.78 180 top
R41  1M  [0603]  31.11,59.31 0 top
R42  10k  [0603]  31.11,53.85 0 top
R43  1k  [0603]  27.43,51.05 180 bottom
R44  10k  [0603]  16.76,54.61 270 bottom
R45  1k  [0603]  73.03,47.12 0 top
R46  1k  [0603]  73.03,48.64 180 top
R47  2.0k  [0603]  71.63,54.86 270 top
R48  10k  [0603]  65.15,60.83 0 top
R49  1k  [0603]  73.03,45.47 0 top
R50  1k  [0603]  73.03,50.29 0 top
R51  1M  [0603]  78.61,57.78 180 top
R52  1M  [0603]  78.61,59.31 0 top
R53  10k  [0603]  78.61,53.85 0 top
R54  1k  [0603]  74.93,51.05 180 bottom
R55  10k  [0603]  64.26,54.61 270 bottom
R56  1k  [0603]  120.52,47.12 0 top
R57  1k  [0603]  120.52,48.64 180 top
R58  2.0k  [0603]  119.13,54.86 270 top
R59  10k  [0603]  112.65,60.83 0 top
R60  1k  [0603]  120.52,45.47 0 top
R61  1k  [0603]  120.52,50.29 0 top
R62  1M  [0603]  126.11,57.78 180 top
R63  1M  [0603]  126.11,59.31 0 top
R64  10k  [0603]  126.11,53.85 0 top
R65  1k  [0603]  122.43,51.05 180 bottom
R66  10k  [0603]  111.76,54.61 270 bottom
R67  1k  [0603]  25.53,78.11 0 top
R68  1k  [0603]  25.53,79.63 180 top
R69  2.0k  [0603]  24.13,85.85 270 top
R70  10k  [0603]  17.65,91.82 0 top
R71  1k  [0603]  25.53,76.45 0 top
R72  1k  [0603]  25.53,81.28 0 top
R73  1M  [0603]  31.11,88.77 180 top
R74  1M  [0603]  31.11,90.3 0 top
R75  10k  [0603]  31.11,84.84 0 top
R76  1k  [0603]  27.43,82.04 180 bottom
R77  10k  [0603]  16.76,85.6 270 bottom
R78  1k  [0603]  73.03,78.11 0 top
R79  1k  [0603]  73.03,79.63 180 top
R80  2.0k  [0603]  71.63,85.85 270 top
R81  10k  [0603]  65.15,91.82 0 top
R82  1k  [0603]  73.03,76.45 0 top
R83  1k  [0603]  73.03,81.28 0 top
R84  1M  [0603]  78.61,88.77 180 top
R85  1M  [0603]  78.61,90.3 0 top
R86  10k  [0603]  78.61,84.84 0 top
R87  1k  [0603]  74.93,82.04 180 bottom
R88  10k  [0603]  64.26,85.6 270 bottom
R89  1k  [0603]  120.52,78.11 0 top
R90  1k  [0603]  120.52,79.63 180 top
R91  2.0k  [0603]  119.13,85.85 270 top
R92  10k  [0603]  112.65,91.82 0 top
R93  1k  [0603]  120.52,76.45 0 top
R94  1k  [0603]  120.52,81.28 0 top
R95  1M  [0603]  126.11,88.77 180 top
R96  1M  [0603]  126.11,90.3 0 top
R97  10k  [0603]  126.11,84.84 0 top
R98  1k  [0603]  122.43,82.04 180 bottom
R99  10k  [0603]  111.76,85.6 270 bottom
S1  Power  [SWITCH_SPST_SMD_A]  15.75,10.92 180 top
S2  Power  [SWITCH_SPST_SMD_A]  63.25,10.92 180 top
S3  [TACTILE_SWITCH_SMD_RIGHT_ANGLE]  15.75,33.27 180 top
S4  [TACTILE_SWITCH_SMD_RIGHT_ANGLE]  63.25,33.27 180 top
S5  Power  [SWITCH_SPST_SMD_A]  110.74,10.92 180 top
S6  [TACTILE_SWITCH_SMD_RIGHT_ANGLE]  110.74,33.27 180 top
S7  Power  [SWITCH_SPST_SMD_A]  15.75,41.91 180 top
S8  [TACTILE_SWITCH_SMD_RIGHT_ANGLE]  15.75,64.26 180 top
S9  Power  [SWITCH_SPST_SMD_A]  63.25,41.91 180 top
S10  [TACTILE_SWITCH_SMD_RIGHT_ANGLE]  63.25,64.26 180 top
S11  Power  [SWITCH_SPST_SMD_A]  110.74,41.91 180 top
S12  [TACTILE_SWITCH_SMD_RIGHT_ANGLE]  110.74,64.26 180 top
S13  Power  [SWITCH_SPST_SMD_A]  15.75,72.9 180 top
S14  [TACTILE_SWITCH_SMD_RIGHT_ANGLE]  15.75,95.25 180 top
S15  Power  [SWITCH_SPST_SMD_A]  63.25,72.9 180 top
S16  [TACTILE_SWITCH_SMD_RIGHT_ANGLE]  63.25,95.25 180 top
S17  Power  [SWITCH_SPST_SMD_A]  110.74,72.9 180 top
S18  [TACTILE_SWITCH_SMD_RIGHT_ANGLE]  110.74,95.25 180 top
TP1  TEST-POINT3  [PAD.03X.03]  43.69,13.21 90 bottom
TP2  TEST-POINT3  [PAD.03X.03]  41.15,13.21 90 bottom
TP3  TEST-POINT3  [PAD.03X.03]  91.19,13.21 90 bottom
TP4  TEST-POINT3  [PAD.03X.03]  88.65,13.21 90 bottom
TP5  TEST-POINT3  [PAD.03X.03]  138.68,13.21 90 bottom
TP6  TEST-POINT3  [PAD.03X.03]  136.14,13.21 90 bottom
TP7  TEST-POINT3  [PAD.03X.03]  43.69,44.2 90 bottom
TP8  TEST-POINT3  [PAD.03X.03]  41.15,44.2 90 bottom
TP9  TEST-POINT3  [PAD.03X.03]  91.19,44.2 90 bottom
TP10  TEST-POINT3  [PAD.03X.03]  88.65,44.2 90 bottom
TP11  TEST-POINT3  [PAD.03X.03]  138.68,44.2 90 bottom
TP12  TEST-POINT3  [PAD.03X.03]  136.14,44.2 90 bottom
TP13  TEST-POINT3  [PAD.03X.03]  43.69,75.18 90 bottom
TP14  TEST-POINT3  [PAD.03X.03]  41.15,75.18 90 bottom
TP15  TEST-POINT3  [PAD.03X.03]  91.19,75.18 90 bottom
TP16  TEST-POINT3  [PAD.03X.03]  88.65,75.18 90 bottom
TP17  TEST-POINT3  [PAD.03X.03]  138.68,75.18 90 bottom
TP18  TEST-POINT3  [PAD.03X.03]  136.14,75.18 90 bottom
U1  MCP73831  [SOT23-5]  26.8,24 90 top
U2  MCP73831  [SOT23-5]  74.3,24 90 top
U3  RFM95W  [RFM95/96/97/98W]  40.64,22.23 180 bottom
U4  ATSAMD21G  [QFN-48_NO_EXPOSED_PAD]  38.86,22.23 270 top
U5  3.3V  [SOT23-5]  68.83,23.88 270 top
U6  3.3V  [SOT23-5]  21.34,23.88 270 top
U7  ATSAMD21G  [QFN-48_NO_EXPOSED_PAD]  86.36,22.23 270 top
U8  RFM95W  [RFM95/96/97/98W]  88.14,22.23 180 bottom
U9  MCP73831  [SOT23-5]  121.79,24 90 top
U10  3.3V  [SOT23-5]  116.33,23.88 270 top
U11  ATSAMD21G  [QFN-48_NO_EXPOSED_PAD]  133.86,22.23 270 top
U12  RFM95W  [RFM95/96/97/98W]  135.64,22.23 180 bottom
U13  MCP73831  [SOT23-5]  26.8,54.99 90 top
U14  3.3V  [SOT23-5]  21.34,54.86 270 top
U15  ATSAMD21G  [QFN-48_NO_EXPOSED_PAD]  38.86,53.21 270 top
U16  RFM95W  [RFM95/96/97/98W]  40.64,53.21 180 bottom
U17  MCP73831  [SOT23-5]  74.3,54.99 90 top
U18  3.3V  [SOT23-5]  68.83,54.86 270 top
U19  ATSAMD21G  [QFN-48_NO_EXPOSED_PAD]  86.36,53.21 270 top
U20  RFM95W  [RFM95/96/97/98W]  88.14,53.21 180 bottom
U21  MCP73831  [SOT23-5]  121.79,54.99 90 top
U22  3.3V  [SOT23-5]  116.33,54.86 270 top
U23  ATSAMD21G  [QFN-48_NO_EXPOSED_PAD]  133.86,53.21 270 top
U24  RFM95W  [RFM95/96/97/98W]  135.64,53.21 180 bottom
U25  MCP73831  [SOT23-5]  26.8,85.98 90 top
U26  3.3V  [SOT23-5]  21.34,85.85 270 top
U27  ATSAMD21G  [QFN-48_NO_EXPOSED_PAD]  38.86,84.2 270 top
U28  RFM95W  [RFM95/96/97/98W]  40.64,84.2 180 bottom
U29  MCP73831  [SOT23-5]  74.3,85.98 90 top
U30  3.3V  [SOT23-5]  68.83,85.85 270 top
U31  ATSAMD21G  [QFN-48_NO_EXPOSED_PAD]  86.36,84.2 270 top
U32  RFM95W  [RFM95/96/97/98W]  88.14,84.2 180 bottom
U33  MCP73831  [SOT23-5]  121.79,85.98 90 top
U34  3.3V  [SOT23-5]  116.33,85.85 270 top
U35  ATSAMD21G  [QFN-48_NO_EXPOSED_PAD]  133.86,84.2 270 top
U36  RFM95W  [RFM95/96/97/98W]  135.64,84.2 180 bottom
U$1  [SAMD21_PRO_RF0]  34.67,15.49 0 top
U$2  [D20]  38.73,12.45 0 bottom
U$3  [A43]  33.4,31.75 0 top
U$4  [A34]  35.94,31.75 0 top
U$5  [A25]  38.48,31.75 0 top
U$6  [A16]  41.02,31.75 0 top
U$7  [A07]  43.43,31.75 0 top
U$8  [MISO8]  25.15,31.75 0 top
U$9  [MOSI9]  27.81,31.75 0 top
U$10  [SCK10]  30.73,31.75 0 top
U$11  [ANT11]  45.59,31.75 0 top
U$12  [GND0]  20.57,33.91 90 top
U$13  [RST2]  40.77,12.45 0 top
U$14  [CHG1]  20.32,31.75 0 top
U$15  [D90]  28.32,12.45 0 top
U$16  [D90]  30.99,12.45 0 bottom
U$17  [GND0]  49.28,10.16 270 bottom
U$18  [D20]  35.94,12.45 0 top
U$19  [RX2]  48.77,12.45 0 bottom
U$20  [D30]  33.4,12.45 0 top
U$21  [D30]  36.2,12.45 0 bottom
U$22  [D40]  30.86,12.45 0 top
U$23  [3V320]  25.53,12.45 0 top
U$24  [RAW21]  22.86,12.45 0 top
U$25  [LORA0]  31.75,17.14 0 bottom
U$26  [A43]  80.9,31.75 0 top
U$27  [SWITCH23]  20.45,6.73 90 top
U$28  [RST2]  14.1,31.12 0 top
U$29  [BATT25]  22.48,16.13 90 top
U$30  [QWIIC-LOGO-MEDIUM]  23.62,27.56 0 bottom
U$31  [D40]  33.66,12.45 0 bottom
U$32  [BATT25]  22.48,20.45 270 bottom
U$33  [D50]  41.15,12.45 0 bottom
U$34  [IO3]  50.85,11.56 90 top
U$35  [WAN1]  28.32,17.14 0 bottom
U$36  [RST2]  17.4,33.27 0 bottom
U$37  [SWITCH23]  20.45,12.19 270 bottom
U$38  [GND0]  20.57,37.46 270 bottom
U$39  [ON#OFF0]  18.54,10.03 0 bottom
U$40  [CHG1]  24,31.75 0 bottom
U$41  [RST2]  43.94,12.45 0 bottom
U$42  [A43]  36.2,31.75 0 bottom
U$43  [A34]  38.86,31.75 0 bottom
U$44  [A25]  41.4,31.75 0 bottom
U$45  [A16]  43.81,31.75 0 bottom
U$46  [A07]  46.36,31.75 0 bottom
U$47  [MISO8]  29.08,31.75 0 bottom
U$48  [MOSI9]  31.88,31.75 0 bottom
U$49  [SCK10]  34.04,31.75 0 bottom
U$50  [ANT11]  49.4,31.75 0 bottom
U$51  [SFE_LOGO_FLAME_.2]  49.63,26.04 0 top
U$52  [RAW21]  26.42,12.45 0 bottom
U$53  [3V320]  28.83,12.45 0 bottom
U$54  [STAT0]  30.61,20.95 0 top
U$55  [D514]  38.48,12.45 0 top
U$56  [CLK4]  50.9,13.39 90 top
U$57  [TX3]  46.36,12.45 0 bottom
U$58  [SWD2]  49.4,17.78 0 top
U$59  [SWD2]  54.46,17.78 0 bottom
U$60  [CLK4]  50.9,13.36 90 bottom
U$61  [OSHW-LOGO-MINI]  11.68,32.77 0 top
U$62  [GND0]  49.28,6.48 90 top
U$63  [PWR-()-03]  30.61,17.65 0 top
U$64  [IO3]  50.88,11.56 90 bottom
U$65  [CHG1]  30.61,19.3 0 top
U$66  [LED0]  20.95,14.35 0 bottom
U$67  [A34]  83.44,31.75 0 top
U$68  [A25]  85.98,31.75 0 top
U$69  [TX3]  43.56,12.45 0 top
U$70  [TX6]  30.61,14.61 0 top
U$71  [A16]  88.52,31.75 0 top
U$72  [RX7]  30.61,16.13 0 top
U$73  [RX2]  46.1,12.45 0 top
U$74  [A07]  90.93,31.75 0 top
U$75  [MISO8]  72.64,31.75 0 top
U$76  [MOSI9]  75.31,31.75 0 top
U$77  [SCK10]  78.23,31.75 0 top
U$78  [ANT11]  93.09,31.75 0 top
U$79  [GND0]  68.07,33.91 90 top
U$80  [RST2]  88.27,12.45 0 top
U$81  [CHG1]  67.82,31.75 0 top
U$82  [3V320]  73.03,12.45 0 top
U$83  [RAW21]  70.36,12.45 0 top
U$84  [SWITCH23]  67.94,6.73 90 top
U$85  [RST2]  61.59,31.12 0 top
U$86  [BATT25]  69.98,16.13 90 top
U$87  [BATT25]  69.98,20.45 270 bottom
U$88  [RST2]  64.9,33.27 0 bottom
U$89  [SWITCH23]  67.94,12.19 270 bottom
U$90  [GND0]  68.07,37.46 270 bottom
U$91  [ON#OFF0]  66.04,10.03 0 bottom
U$92  [CHG1]  71.5,31.75 0 bottom
U$93  [RST2]  91.44,12.45 0 bottom
U$94  [A43]  83.69,31.75 0 bottom
U$95  [A34]  86.36,31.75 0 bottom
U$96  [A25]  88.9,31.75 0 bottom
U$97  [A16]  91.31,31.75 0 bottom
U$98  [A07]  93.85,31.75 0 bottom
U$99  [MISO8]  76.58,31.75 0 bottom
U$100  [MOSI9]  79.38,31.75 0 bottom
U$101  [SCK10]  81.53,31.75 0 bottom
U$102  [ANT11]  96.9,31.75 0 bottom
U$103  [RAW21]  73.91,12.45 0 bottom
U$104  [3V320]  76.33,12.45 0 bottom
U$105  [GND0]  96.77,6.48 90 top
U$106  [PWR-()-03]  78.1,17.65 0 top
U$107  [TX3]  91.06,12.45 0 top
U$108  [TX6]  78.1,14.61 0 top
U$109  [RX7]  78.1,16.13 0 top
U$110  [RX2]  93.6,12.45 0 top
U$111  [CHG1]  78.1,19.3 0 top
U$112  [D514]  85.98,12.45 0 top
U$113  [D90]  75.82,12.45 0 top
U$114  [D90]  78.49,12.45 0 bottom
U$115  [GND0]  96.77,10.16 270 bottom
U$116  [RX2]  96.27,12.45 0 bottom
U$117  [TX3]  93.85,12.45 0 bottom
U$118  [LORA0]  79.25,17.14 0 bottom
U$119  [WAN1]  75.82,17.14 0 bottom
U$120  [SAMD21_PRO_RF0]  82.17,15.49 0 top
U$121  [D20]  86.23,12.45 0 bottom
U$122  [D30]  83.69,12.45 0 bottom
U$123  [D40]  81.15,12.45 0 bottom
U$124  [D50]  88.65,12.45 0 bottom
U$125  [D20]  83.44,12.45 0 top
U$126  [D30]  80.9,12.45 0 top
U$127  [D40]  78.36,12.45 0 top
U$128  [QWIIC-LOGO-MEDIUM]  71.12,27.56 0 bottom
U$129  [OSHW-LOGO-MINI]  59.18,32.77 0 top
U$130  [STAT0]  78.1,20.95 0 top
U$131  [SFE_LOGO_FLAME_.2]  97.13,26.04 0 top
U$132  [IO3]  98.35,11.56 90 top
U$133  [CLK4]  98.4,13.39 90 top
U$134  [SWD2]  96.9,17.78 0 top
U$135  [SWD2]  101.96,17.78 0 bottom
U$136  [CLK4]  98.4,13.36 90 bottom
U$137  [IO3]  98.37,11.56 90 bottom
U$138  [LED0]  68.45,14.35 0 bottom
U$139  [A43]  128.4,31.75 0 top
U$140  [A34]  130.94,31.75 0 top
U$141  [A25]  133.48,31.75 0 top
U$142  [A16]  136.02,31.75 0 top
U$143  [A07]  138.43,31.75 0 top
U$144  [MISO8]  120.14,31.75 0 top
U$145  [MOSI9]  122.81,31.75 0 top
U$146  [SCK10]  125.73,31.75 0 top
U$147  [ANT11]  140.59,31.75 0 top
U$148  [GND0]  115.57,33.91 90 top
U$149  [RST2]  135.76,12.45 0 top
U$150  [CHG1]  115.32,31.75 0 top
U$151  [3V320]  120.52,12.45 0 top
U$152  [RAW21]  117.86,12.45 0 top
U$153  [SWITCH23]  115.44,6.73 90 top
U$154  [RST2]  109.09,31.12 0 top
U$155  [BATT25]  117.47,16.13 90 top
U$156  [BATT25]  117.47,20.45 270 bottom
U$157  [RST2]  112.39,33.27 0 bottom
U$158  [SWITCH23]  115.44,12.19 270 bottom
U$159  [GND0]  115.57,37.46 270 bottom
U$160  [ON#OFF0]  113.54,10.03 0 bottom
U$161  [CHG1]  119,31.75 0 bottom
U$162  [RST2]  138.94,12.45 0 bottom
U$163  [A43]  131.19,31.75 0 bottom
U$164  [A34]  133.86,31.75 0 bottom
U$165  [A25]  136.4,31.75 0 bottom
U$166  [A16]  138.81,31.75 0 bottom
U$167  [A07]  141.35,31.75 0 bottom
U$168  [MISO8]  124.08,31.75 0 bottom
U$169  [MOSI9]  126.87,31.75 0 bottom
U$170  [SCK10]  129.03,31.75 0 bottom
U$171  [ANT11]  144.4,31.75 0 bottom
U$172  [RAW21]  121.41,12.45 0 bottom
U$173  [3V320]  123.83,12.45 0 bottom
U$174  [GND0]  144.27,6.48 90 top
U$175  [PWR-()-03]  125.6,17.65 0 top
U$176  [TX3]  138.56,12.45 0 top
U$177  [TX6]  125.6,14.61 0 top
U$178  [RX7]  125.6,16.13 0 top
U$179  [RX2]  141.1,12.45 0 top
U$180  [CHG1]  125.6,19.3 0 top
U$181  [D514]  133.48,12.45 0 top
U$182  [D90]  123.32,12.45 0 top
U$183  [D90]  125.98,12.45 0 bottom
U$184  [GND0]  144.27,10.16 270 bottom
U$185  [RX2]  143.76,12.45 0 bottom
U$186  [TX3]  141.35,12.45 0 bottom
U$187  [LORA0]  126.75,17.14 0 bottom
U$188  [WAN1]  123.32,17.14 0 bottom
U$189  [SAMD21_PRO_RF0]  129.67,15.49 0 top
U$190  [D20]  133.73,12.45 0 bottom
U$191  [D30]  131.19,12.45 0 bottom
U$192  [D40]  128.65,12.45 0 bottom
U$193  [D50]  136.14,12.45 0 bottom
U$194  [D20]  130.94,12.45 0 top
U$195  [D30]  128.4,12.45 0 top
U$196  [D40]  125.86,12.45 0 top
U$197  [QWIIC-LOGO-MEDIUM]  118.62,27.56 0 bottom
U$198  [OSHW-LOGO-MINI]  106.68,32.77 0 top
U$199  [STAT0]  125.6,20.95 0 top
U$200  [SFE_LOGO_FLAME_.2]  144.63,26.04 0 top
U$201  [IO3]  145.85,11.56 90 top
U$202  [CLK4]  145.9,13.39 90 top
U$203  [SWD2]  144.4,17.78 0 top
U$204  [SWD2]  149.45,17.78 0 bottom
U$205  [CLK4]  145.9,13.36 90 bottom
U$206  [IO3]  145.87,11.56 90 bottom
U$207  [LED0]  115.95,14.35 0 bottom
U$208  [A43]  33.4,62.74 0 top
U$209  [A34]  35.94,62.74 0 top
U$210  [A25]  38.48,62.74 0 top
U$211  [A16]  41.02,62.74 0 top
U$212  [A07]  43.43,62.74 0 top
U$213  [MISO8]  25.15,62.74 0 top
U$214  [MOSI9]  27.81,62.74 0 top
U$215  [SCK10]  30.73,62.74 0 top
U$216  [ANT11]  45.59,62.74 0 top
U$217  [GND0]  20.57,64.9 90 top
U$218  [RST2]  40.77,43.43 0 top
U$219  [CHG1]  20.32,62.74 0 top
U$220  [3V320]  25.53,43.43 0 top
U$221  [RAW21]  22.86,43.43 0 top
U$222  [SWITCH23]  20.45,37.72 90 top
U$223  [RST2]  14.1,62.1 0 top
U$224  [BATT25]  22.48,47.12 90 top
U$225  [BATT25]  22.48,51.43 270 bottom
U$226  [RST2]  17.4,64.26 0 bottom
U$227  [SWITCH23]  20.45,43.18 270 bottom
U$228  [GND0]  20.57,68.45 270 bottom
U$229  [ON#OFF0]  18.54,41.02 0 bottom
U$230  [CHG1]  24,62.74 0 bottom
U$231  [RST2]  43.94,43.43 0 bottom
U$232  [A43]  36.2,62.74 0 bottom
U$233  [A34]  38.86,62.74 0 bottom
U$234  [A25]  41.4,62.74 0 bottom
U$235  [A16]  43.81,62.74 0 bottom
U$236  [A07]  46.36,62.74 0 bottom
U$237  [MISO8]  29.08,62.74 0 bottom
U$238  [MOSI9]  31.88,62.74 0 bottom
U$239  [SCK10]  34.04,62.74 0 bottom
U$240  [ANT11]  49.4,62.74 0 bottom
U$241  [RAW21]  26.42,43.43 0 bottom
U$242  [3V320]  28.83,43.43 0 bottom
U$243  [GND0]  49.28,37.46 90 top
U$244  [PWR-()-03]  30.61,48.64 0 top
U$245  [TX3]  43.56,43.43 0 top
U$246  [TX6]  30.61,45.59 0 top
U$247  [RX7]  30.61,47.12 0 top
U$248  [RX2]  46.1,43.43 0 top
U$249  [CHG1]  30.61,50.29 0 top
U$250  [D514]  38.48,43.43 0 top
U$251  [D90]  28.32,43.43 0 top
U$252  [D90]  30.99,43.43 0 bottom
U$253  [GND0]  49.28,41.15 270 bottom
U$254  [RX2]  48.77,43.43 0 bottom
U$255  [TX3]  46.36,43.43 0 bottom
U$256  [LORA0]  31.75,48.13 0 bottom
U$257  [WAN1]  28.32,48.13 0 bottom
U$258  [SAMD21_PRO_RF0]  34.67,46.48 0 top
U$259  [D20]  38.73,43.43 0 bottom
U$260  [D30]  36.2,43.43 0 bottom
U$261  [D40]  33.66,43.43 0 bottom
U$262  [D50]  41.15,43.43 0 bottom
U$263  [D20]  35.94,43.43 0 top
U$264  [D30]  33.4,43.43 0 top
U$265  [D40]  30.86,43.43 0 top
U$266  [QWIIC-LOGO-MEDIUM]  23.62,58.55 0 bottom
U$267  [OSHW-LOGO-MINI]  11.68,63.75 0 top
U$268  [STAT0]  30.61,51.94 0 top
U$269  [SFE_LOGO_FLAME_.2]  49.63,57.02 0 top
U$270  [IO3]  50.85,42.54 90 top
U$271  [CLK4]  50.9,44.37 90 top
U$272  [SWD2]  49.4,48.77 0 top
U$273  [SWD2]  54.46,48.77 0 bottom
U$274  [CLK4]  50.9,44.35 90 bottom
U$275  [IO3]  50.88,42.54 90 bottom
U$276  [LED0]  20.95,45.34 0 bottom
U$277  [A43]  80.9,62.74 0 top
U$278  [A34]  83.44,62.74 0 top
U$279  [A25]  85.98,62.74 0 top
U$280  [A16]  88.52,62.74 0 top
U$281  [A07]  90.93,62.74 0 top
U$282  [MISO8]  72.64,62.74 0 top
U$283  [MOSI9]  75.31,62.74 0 top
U$284  [SCK10]  78.23,62.74 0 top
U$285  [ANT11]  93.09,62.74 0 top
U$286  [GND0]  68.07,64.9 90 top
U$287  [RST2]  88.27,43.43 0 top
U$288  [CHG1]  67.82,62.74 0 top
U$289  [3V320]  73.03,43.43 0 top
U$290  [RAW21]  70.36,43.43 0 top
U$291  [SWITCH23]  67.94,37.72 90 top
U$292  [RST2]  61.59,62.1 0 top
U$293  [BATT25]  69.98,47.12 90 top
U$294  [BATT25]  69.98,51.43 270 bottom
U$295  [RST2]  64.9,64.26 0 bottom
U$296  [SWITCH23]  67.94,43.18 270 bottom
U$297  [GND0]  68.07,68.45 270 bottom
U$298  [ON#OFF0]  66.04,41.02 0 bottom
U$299  [CHG1]  71.5,62.74 0 bottom
U$300  [RST2]  91.44,43.43 0 bottom
U$301  [A43]  83.69,62.74 0 bottom
U$302  [A34]  86.36,62.74 0 bottom
U$303  [A25]  88.9,62.74 0 bottom
U$304  [A16]  91.31,62.74 0 bottom
U$305  [A07]  93.85,62.74 0 bottom
U$306  [MISO8]  76.58,62.74 0 bottom
U$307  [MOSI9]  79.38,62.74 0 bottom
U$308  [SCK10]  81.53,62.74 0 bottom
U$309  [ANT11]  96.9,62.74 0 bottom
U$310  [RAW21]  73.91,43.43 0 bottom
U$311  [3V320]  76.33,43.43 0 bottom
U$312  [GND0]  96.77,37.46 90 top
U$313  [PWR-()-03]  78.1,48.64 0 top
U$314  [TX3]  91.06,43.43 0 top
U$315  [TX6]  78.1,45.59 0 top
U$316  [RX7]  78.1,47.12 0 top
U$317  [RX2]  93.6,43.43 0 top
U$318  [CHG1]  78.1,50.29 0 top
U$319  [D514]  85.98,43.43 0 top
U$320  [D90]  75.82,43.43 0 top
U$321  [D90]  78.49,43.43 0 bottom
U$322  [GND0]  96.77,41.15 270 bottom
U$323  [RX2]  96.27,43.43 0 bottom
U$324  [TX3]  93.85,43.43 0 bottom
U$325  [LORA0]  79.25,48.13 0 bottom
U$326  [WAN1]  75.82,48.13 0 bottom
U$327  [SAMD21_PRO_RF0]  82.17,46.48 0 top
U$328  [D20]  86.23,43.43 0 bottom
U$329  [D30]  83.69,43.43 0 bottom
U$330  [D40]  81.15,43.43 0 bottom
U$331  [D50]  88.65,43.43 0 bottom
U$332  [D20]  83.44,43.43 0 top
U$333  [D30]  80.9,43.43 0 top
U$334  [D40]  78.36,43.43 0 top
U$335  [QWIIC-LOGO-MEDIUM]  71.12,58.55 0 bottom
U$336  [OSHW-LOGO-MINI]  59.18,63.75 0 top
U$337  [STAT0]  78.1,51.94 0 top
U$338  [SFE_LOGO_FLAME_.2]  97.13,57.02 0 top
U$339  [IO3]  98.35,42.54 90 top
U$340  [CLK4]  98.4,44.37 90 top
U$341  [SWD2]  96.9,48.77 0 top
U$342  [SWD2]  101.96,48.77 0 bottom
U$343  [CLK4]  98.4,44.35 90 bottom
U$344  [IO3]  98.37,42.54 90 bottom
U$345  [LED0]  68.45,45.34 0 bottom
U$346  [A43]  128.4,62.74 0 top
U$347  [A34]  130.94,62.74 0 top
U$348  [A25]  133.48,62.74 0 top
U$349  [A16]  136.02,62.74 0 top
U$350  [A07]  138.43,62.74 0 top
U$351  [MISO8]  120.14,62.74 0 top
U$352  [MOSI9]  122.81,62.74 0 top
U$353  [SCK10]  125.73,62.74 0 top
U$354  [ANT11]  140.59,62.74 0 top
U$355  [GND0]  115.57,64.9 90 top
U$356  [RST2]  135.76,43.43 0 top
U$357  [CHG1]  115.32,62.74 0 top
U$358  [3V320]  120.52,43.43 0 top
U$359  [RAW21]  117.86,43.43 0 top
U$360  [SWITCH23]  115.44,37.72 90 top
U$361  [RST2]  109.09,62.1 0 top
U$362  [BATT25]  117.47,47.12 90 top
U$363  [BATT25]  117.47,51.43 270 bottom
U$364  [RST2]  112.39,64.26 0 bottom
U$365  [SWITCH23]  115.44,43.18 270 bottom
U$366  [GND0]  115.57,68.45 270 bottom
U$367  [ON#OFF0]  113.54,41.02 0 bottom
U$368  [CHG1]  119,62.74 0 bottom
U$369  [RST2]  138.94,43.43 0 bottom
U$370  [A43]  131.19,62.74 0 bottom
U$371  [A34]  133.86,62.74 0 bottom
U$372  [A25]  136.4,62.74 0 bottom
U$373  [A16]  138.81,62.74 0 bottom
U$374  [A07]  141.35,62.74 0 bottom
U$375  [MISO8]  124.08,62.74 0 bottom
U$376  [MOSI9]  126.87,62.74 0 bottom
U$377  [SCK10]  129.03,62.74 0 bottom
U$378  [ANT11]  144.4,62.74 0 bottom
U$379  [RAW21]  121.41,43.43 0 bottom
U$380  [3V320]  123.83,43.43 0 bottom
U$381  [GND0]  144.27,37.46 90 top
U$382  [PWR-()-03]  125.6,48.64 0 top
U$383  [TX3]  138.56,43.43 0 top
U$384  [TX6]  125.6,45.59 0 top
U$385  [RX7]  125.6,47.12 0 top
U$386  [RX2]  141.1,43.43 0 top
U$387  [CHG1]  125.6,50.29 0 top
U$388  [D514]  133.48,43.43 0 top
U$389  [D90]  123.32,43.43 0 top
U$390  [D90]  125.98,43.43 0 bottom
U$391  [GND0]  144.27,41.15 270 bottom
U$392  [RX2]  143.76,43.43 0 bottom
U$393  [TX3]  141.35,43.43 0 bottom
U$394  [LORA0]  126.75,48.13 0 bottom
U$395  [WAN1]  123.32,48.13 0 bottom
U$396  [SAMD21_PRO_RF0]  129.67,46.48 0 top
U$397  [D20]  133.73,43.43 0 bottom
U$398  [D30]  131.19,43.43 0 bottom
U$399  [D40]  128.65,43.43 0 bottom
U$400  [D50]  136.14,43.43 0 bottom
U$401  [D20]  130.94,43.43 0 top
U$402  [D30]  128.4,43.43 0 top
U$403  [D40]  125.86,43.43 0 top
U$404  [QWIIC-LOGO-MEDIUM]  118.62,58.55 0 bottom
U$405  [OSHW-LOGO-MINI]  106.68,63.75 0 top
U$406  [STAT0]  125.6,51.94 0 top
U$407  [SFE_LOGO_FLAME_.2]  144.63,57.02 0 top
U$408  [IO3]  145.85,42.54 90 top
U$409  [CLK4]  145.9,44.37 90 top
U$410  [SWD2]  144.4,48.77 0 top
U$411  [SWD2]  149.45,48.77 0 bottom
U$412  [CLK4]  145.9,44.35 90 bottom
U$413  [IO3]  145.87,42.54 90 bottom
U$414  [LED0]  115.95,45.34 0 bottom
U$415  [A43]  33.4,93.73 0 top
U$416  [A34]  35.94,93.73 0 top
U$417  [A25]  38.48,93.73 0 top
U$418  [A16]  41.02,93.73 0 top
U$419  [A07]  43.43,93.73 0 top
U$420  [MISO8]  25.15,93.73 0 top
U$421  [MOSI9]  27.81,93.73 0 top
U$422  [SCK10]  30.73,93.73 0 top
U$423  [ANT11]  45.59,93.73 0 top
U$424  [GND0]  20.57,95.89 90 top
U$425  [RST2]  40.77,74.42 0 top
U$426  [CHG1]  20.32,93.73 0 top
U$427  [3V320]  25.53,74.42 0 top
U$428  [RAW21]  22.86,74.42 0 top
U$429  [SWITCH23]  20.45,68.71 90 top
U$430  [RST2]  14.1,93.09 0 top
U$431  [BATT25]  22.48,78.11 90 top
U$432  [BATT25]  22.48,82.42 270 bottom
U$433  [RST2]  17.4,95.25 0 bottom
U$434  [SWITCH23]  20.45,74.17 270 bottom
U$435  [GND0]  20.57,99.44 270 bottom
U$436  [ON#OFF0]  18.54,72.01 0 bottom
U$437  [CHG1]  24,93.73 0 bottom
U$438  [RST2]  43.94,74.42 0 bottom
U$439  [A43]  36.2,93.73 0 bottom
U$440  [A34]  38.86,93.73 0 bottom
U$441  [A25]  41.4,93.73 0 bottom
U$442  [A16]  43.81,93.73 0 bottom
U$443  [A07]  46.36,93.73 0 bottom
U$444  [MISO8]  29.08,93.73 0 bottom
U$445  [MOSI9]  31.88,93.73 0 bottom
U$446  [SCK10]  34.04,93.73 0 bottom
U$447  [ANT11]  49.4,93.73 0 bottom
U$448  [RAW21]  26.42,74.42 0 bottom
U$449  [3V320]  28.83,74.42 0 bottom
U$450  [GND0]  49.28,68.45 90 top
U$451  [PWR-()-03]  30.61,79.63 0 top
U$452  [TX3]  43.56,74.42 0 top
U$453  [TX6]  30.61,76.58 0 top
U$454  [RX7]  30.61,78.11 0 top
U$455  [RX2]  46.1,74.42 0 top
U$456  [CHG1]  30.61,81.28 0 top
U$457  [D514]  38.48,74.42 0 top
U$458  [D90]  28.32,74.42 0 top
U$459  [D90]  30.99,74.42 0 bottom
U$460  [GND0]  49.28,72.14 270 bottom
U$461  [RX2]  48.77,74.42 0 bottom
U$462  [TX3]  46.36,74.42 0 bottom
U$463  [LORA0]  31.75,79.12 0 bottom
U$464  [WAN1]  28.32,79.12 0 bottom
U$465  [SAMD21_PRO_RF0]  34.67,77.47 0 top
U$466  [D20]  38.73,74.42 0 bottom
U$467  [D30]  36.2,74.42 0 bottom
U$468  [D40]  33.66,74.42 0 bottom
U$469  [D50]  41.15,74.42 0 bottom
U$470  [D20]  35.94,74.42 0 top
U$471  [D30]  33.4,74.42 0 top
U$472  [D40]  30.86,74.42 0 top
U$473  [QWIIC-LOGO-MEDIUM]  23.62,89.54 0 bottom
U$474  [OSHW-LOGO-MINI]  11.68,94.74 0 top
U$475  [STAT0]  30.61,82.93 0 top
U$476  [SFE_LOGO_FLAME_.2]  49.63,88.01 0 top
U$477  [IO3]  50.85,73.53 90 top
U$478  [CLK4]  50.9,75.36 90 top
U$479  [SWD2]  49.4,79.76 0 top
U$480  [SWD2]  54.46,79.76 0 bottom
U$481  [CLK4]  50.9,75.34 90 bottom
U$482  [IO3]  50.88,73.53 90 bottom
U$483  [LED0]  20.95,76.33 0 bottom
U$484  [A43]  80.9,93.73 0 top
U$485  [A34]  83.44,93.73 0 top
U$486  [A25]  85.98,93.73 0 top
U$487  [A16]  88.52,93.73 0 top
U$488  [A07]  90.93,93.73 0 top
U$489  [MISO8]  72.64,93.73 0 top
U$490  [MOSI9]  75.31,93.73 0 top
U$491  [SCK10]  78.23,93.73 0 top
U$492  [ANT11]  93.09,93.73 0 top
U$493  [GND0]  68.07,95.89 90 top
U$494  [RST2]  88.27,74.42 0 top
U$495  [CHG1]  67.82,93.73 0 top
U$496  [3V320]  73.03,74.42 0 top
U$497  [RAW21]  70.36,74.42 0 top
U$498  [SWITCH23]  67.94,68.71 90 top
U$499  [RST2]  61.59,93.09 0 top
U$500  [BATT25]  69.98,78.11 90 top
U$501  [BATT25]  69.98,82.42 270 bottom
U$502  [RST2]  64.9,95.25 0 bottom
U$503  [SWITCH23]  67.94,74.17 270 bottom
U$504  [GND0]  68.07,99.44 270 bottom
U$505  [ON#OFF0]  66.04,72.01 0 bottom
U$506  [CHG1]  71.5,93.73 0 bottom
U$507  [RST2]  91.44,74.42 0 bottom
U$508  [A43]  83.69,93.73 0 bottom
U$509  [A34]  86.36,93.73 0 bottom
U$510  [A25]  88.9,93.73 0 bottom
U$511  [A16]  91.31,93.73 0 bottom
U$512  [A07]  93.85,93.73 0 bottom
U$513  [MISO8]  76.58,93.73 0 bottom
U$514  [MOSI9]  79.38,93.73 0 bottom